# EAGLE board fonte_schema (EAGLE 9.6.2)
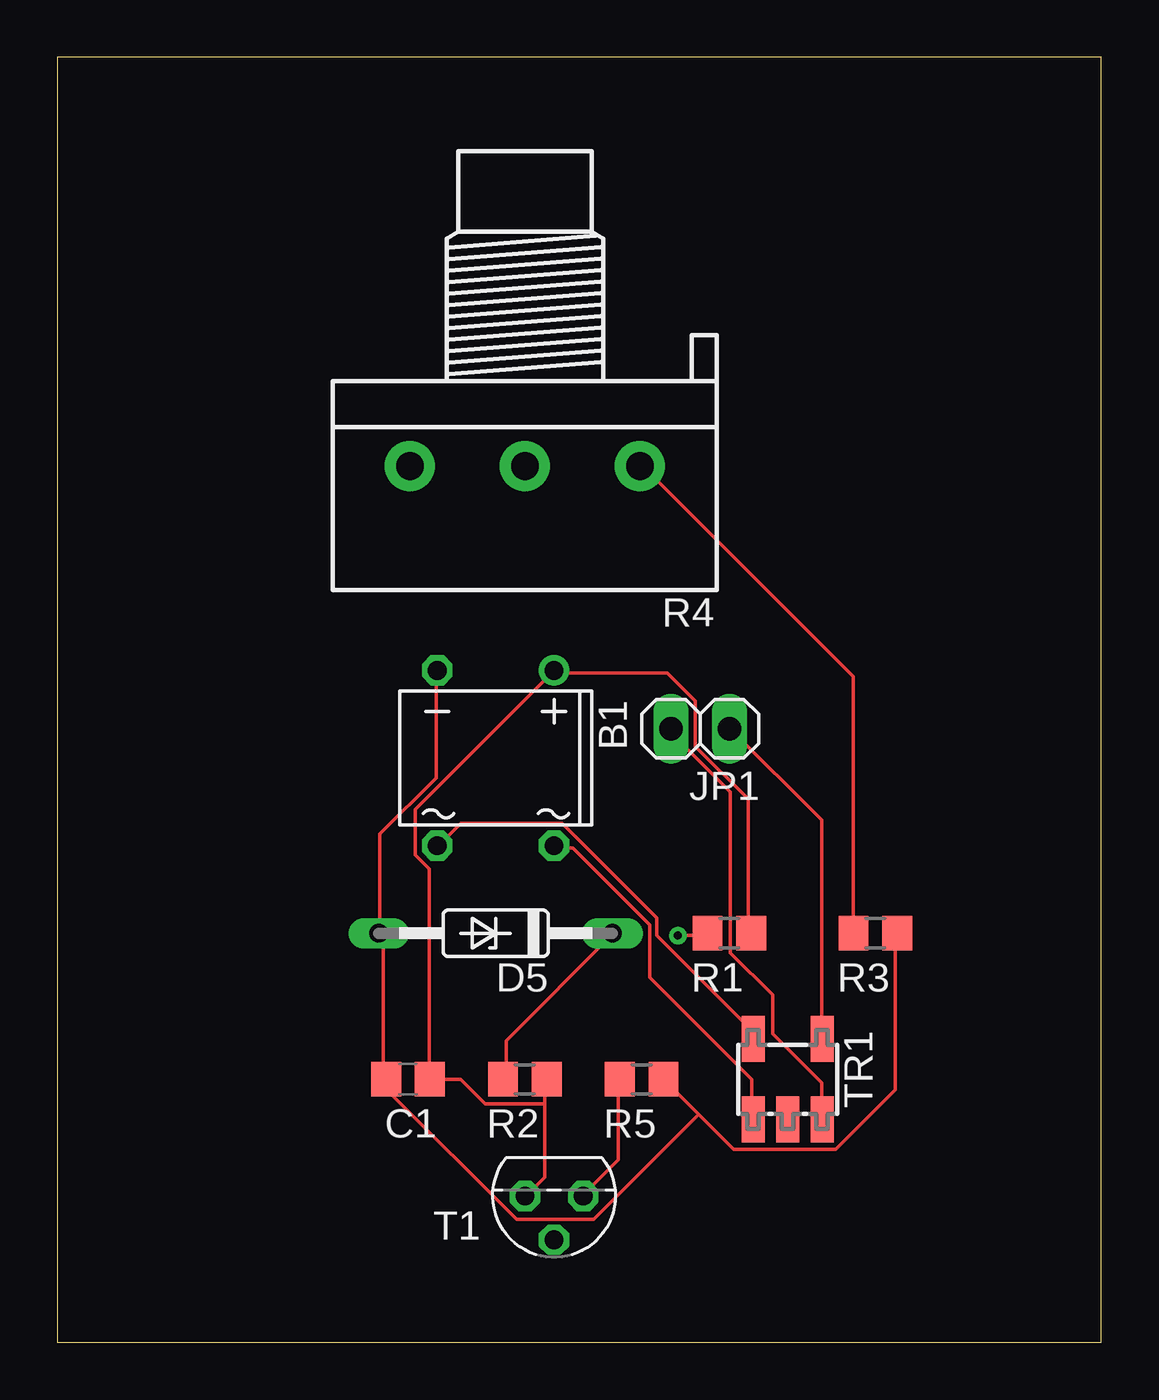
[diagram p0: board, top side]
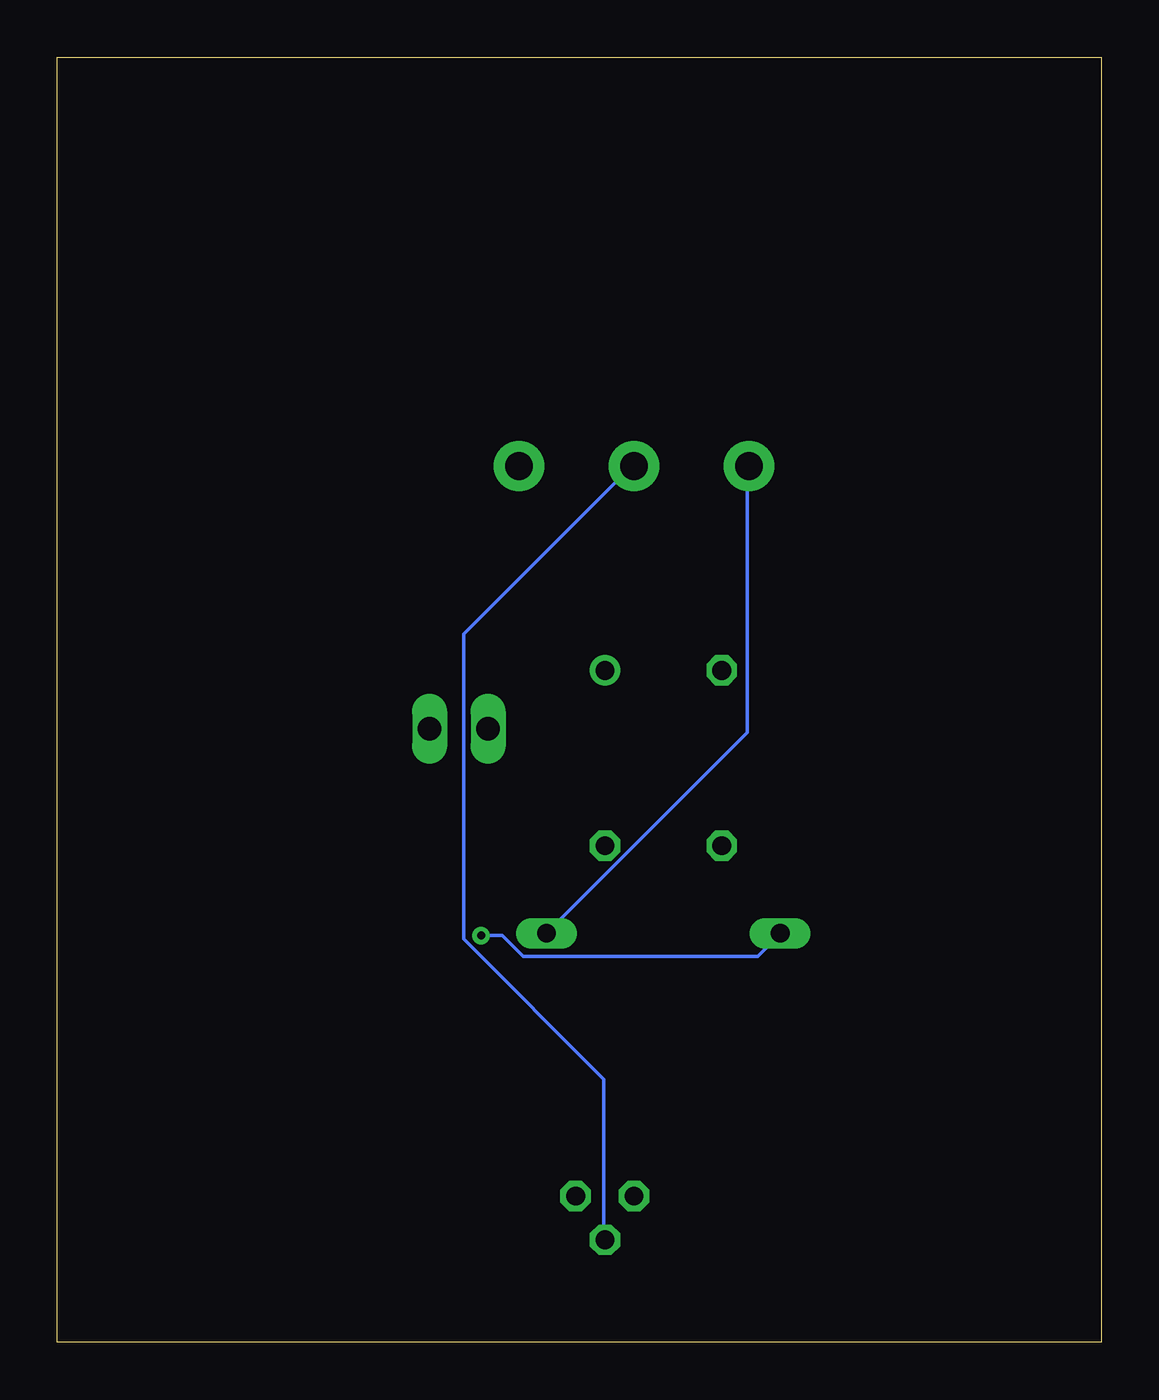
[diagram p1: board, bottom side, seen from below]

Size 45.39 x 55.87 mm. Coordinates in mm from the lower left corner, seen from the top.
Outline: 0,0 45.39,0 45.39,55.87 0,55.87 0,0
Copper layers (1*16): Top 0.035mm / dielectric 1.5mm / Bottom 0.035mm
Design rules "default": minimum track width 6mil, minimum drill 0.35mm, track to track 6mil, track to pad 6mil, pad to pad 6mil, via to via 6mil, smd to smd 6mil, copper to edge 40mil, drill to drill 6mil, minimum pad ring 10mil, minimum via ring 8mil, stop-mask expansion 4mil, vias tented up to drill 0mil, thermal gap 10mil

## Footprints (pad centres in the part's own frame; a part is rotated, then mirrored left to right if it is on the bottom)
DB = drill 0.813: + -2.54,-3.81 | drill 0.813 octagon: - 2.54,-3.81; AC1 2.54,3.81; AC2 -2.54,3.81
C0805 = smd 1.3 x 1.5: 1 -0.95,0; 2 0.95,0
DO35Z10 = drill 0.813 long: A 5.08,0; C -5.08,0
1X02 = drill 1.016 long: 1 -1.27,0; 2 1.27,0
R0805 = smd 1.3 x 1.5: 1 -0.95,0; 2 0.95,0
3RP/1610N = drill 1.2 pad 2.184: 1 -5,0; 2 0,0; 3 5,0
TO92 = drill 0.813 octagon: 1 1.27,0; 2 0,1.905; 3 -1.27,0
SM-T4 = smd 1 x 2: 1 -1.5,-1.75; 2 -1.5,1.75; 3 0,1.75; 4 1.5,1.75; 5 1.5,-1.75

## Placement (x,y rotation side)
B1  DBDB105G  [DB]  19.05,25.4 180 top
C1  470u  [C0805]  15.24,11.43 180 top
D5  13v  [DO35Z10]  19.05,17.78 180 top
JP1  127V  [1X02]  27.94,26.67 180 top
R1  1.8k  [R0805]  29.21,17.78 180 top
R2  330  [R0805]  20.32,11.43 180 top
R3  2.2k  [R0805]  35.56,17.78 180 top
R4  4.7k  [3RP/1610N]  20.32,38.1 180 top
R5  120  [R0805]  25.4,11.43 180 top
T1  2N3904  [TO92]  21.59,6.35 180 top
TR1  15V  [SM-T4]  31.75,11.43 180 top

## Library data of the parts
B1 = rectifier
C1 = rcl; SPICEPREFIX: C
D5 = diode; SPICEPREFIX: D
JP1 = pinhead; SPICEPREFIX: H
R1-R3 R5 = rcl; SPICEPREFIX: R
R4 = pot; SPICEPREFIX: J
T1 = transistor; SPICEPREFIX: J
TR1 = inductor-neosid; OC_FARNELL: unknown; OC_NEWARK: unknown; SPICEPREFIX: T

## Nets
N$1: B1.- C1.2 D5.A R1.2 R3.1 R5.1
N$2: B1.AC1 TR1.5
N$3: B1.+ C1.1 R1.1 R2.1 T1.1
N$4: D5.C R2.2 R4.3
N$5: B1.AC2 TR1.4
N$6: R4.2 T1.2
N$7: R3.2 R4.1
N$8: R5.2 T1.3
N$9: JP1.1 TR1.1
N$10: JP1.2 TR1.2

## Tracks (layer width: path | path; a pad name or v marks a point on that pad's centre or on a via)
N$1  (via drill 0.35)
  Top 0.152: 27.89,9.91 26.37,11.43 R5.1 | 27.89,9.91 29.41,8.38 33.83,8.38 36.42,10.97 36.42,17.68 R3.1 | v26.98,17.68 28.19,17.68 R1.2 | B1.- 16.46,29.11 16.46,24.54 14.02,22.1 14.02,17.83 D5.A 14.02,17.68 14.17,17.53 14.17,11.43 C1.2 14.33,11.43 14.33,10.97 19.96,5.33 23.32,5.33 27.89,9.91
  Bottom 0.152: v26.98,17.68 26.06,17.68 25.15,16.76 14.94,16.76 14.02,17.68 D5.A
N$2
  Top 0.152: TR1.5 30.18,13.26 30.18,13.56 26.06,17.68 26.06,18.44 21.95,22.55 17.53,22.55 16.61,21.64 B1.AC1
N$3
  Top 0.152: 21.18,10.36 21.18,7.16 20.42,6.4 T1.1 | 21.18,10.36 21.18,11.43 R2.1 | 21.18,10.36 18.59,10.36 17.53,11.43 C1.1 16.15,11.43 16.15,20.57 15.55,21.18 15.55,23.16 B1.+ 21.64,29.11 26.52,29.11 27.74,27.89 27.74,25.91 30.02,23.62 30.02,17.83 R1.1
N$4
  Top 0.152: R2.2 19.51,11.43 19.51,13.11 24.08,17.68 D5.C
  Bottom 0.152: D5.C 15.39,26.52 15.39,38.1 R4.3
N$5
  Top 0.152: TR1.4 30.18,9.75 30.18,11.43 25.76,15.85 25.76,18.14 22.4,21.49 21.64,21.49 B1.AC2
N$6
  Bottom 0.152: T1.2 21.64,4.57 21.64,11.43 27.74,17.53 27.74,30.79 20.42,38.1 R4.2
N$7
  Top 0.152: R3.2 34.59,17.83 34.59,28.96 25.45,38.1 R4.1
N$8
  Top 0.152: R5.2 24.38,11.43 24.38,7.93 22.86,6.4 T1.3
N$9
  Top 0.152: TR1.1 33.22,13.26 33.22,22.71 29.26,26.67 JP1.1
N$10
  Top 0.152: JP1.2 26.67,26.52 29.26,23.93 29.26,16.92 31.09,15.09 31.09,13.41 33.22,11.28 33.22,9.75 TR1.2